# EAGLE board easySens-RS485-RND_455-00307-V001 (EAGLE 7.6.0)
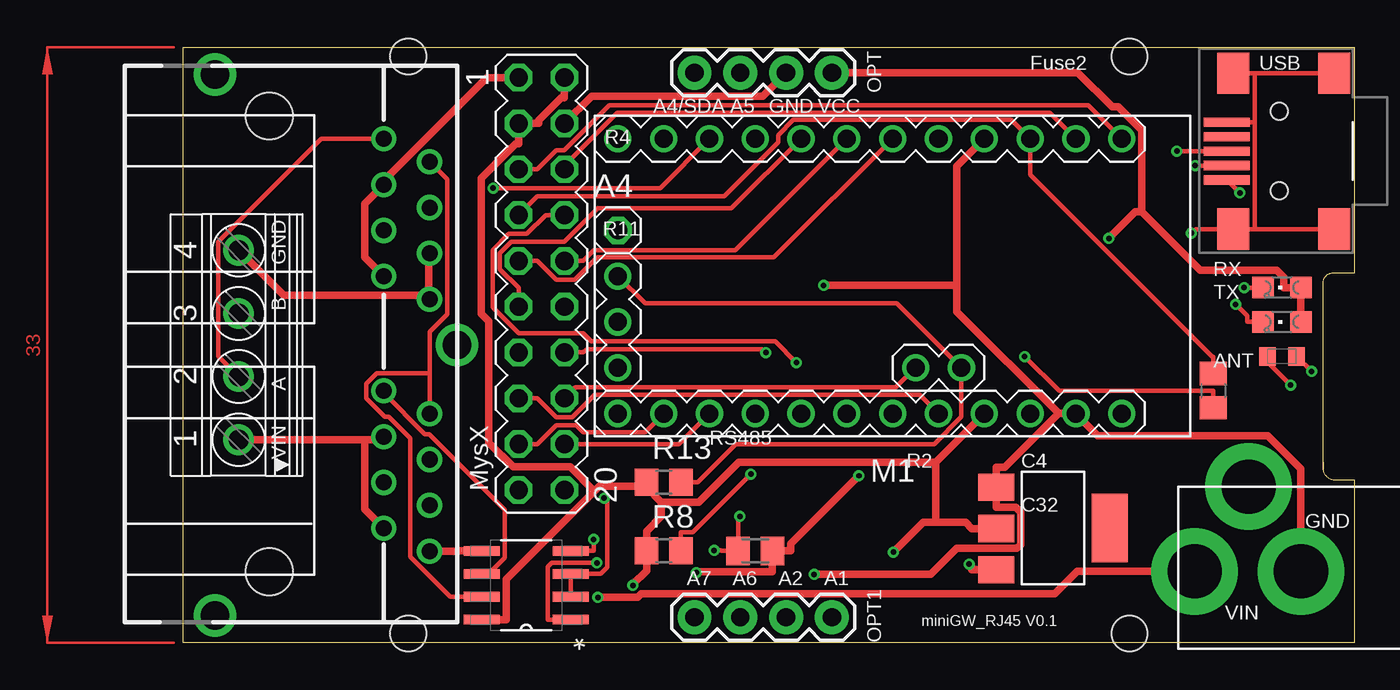
[diagram p0: board, top side]
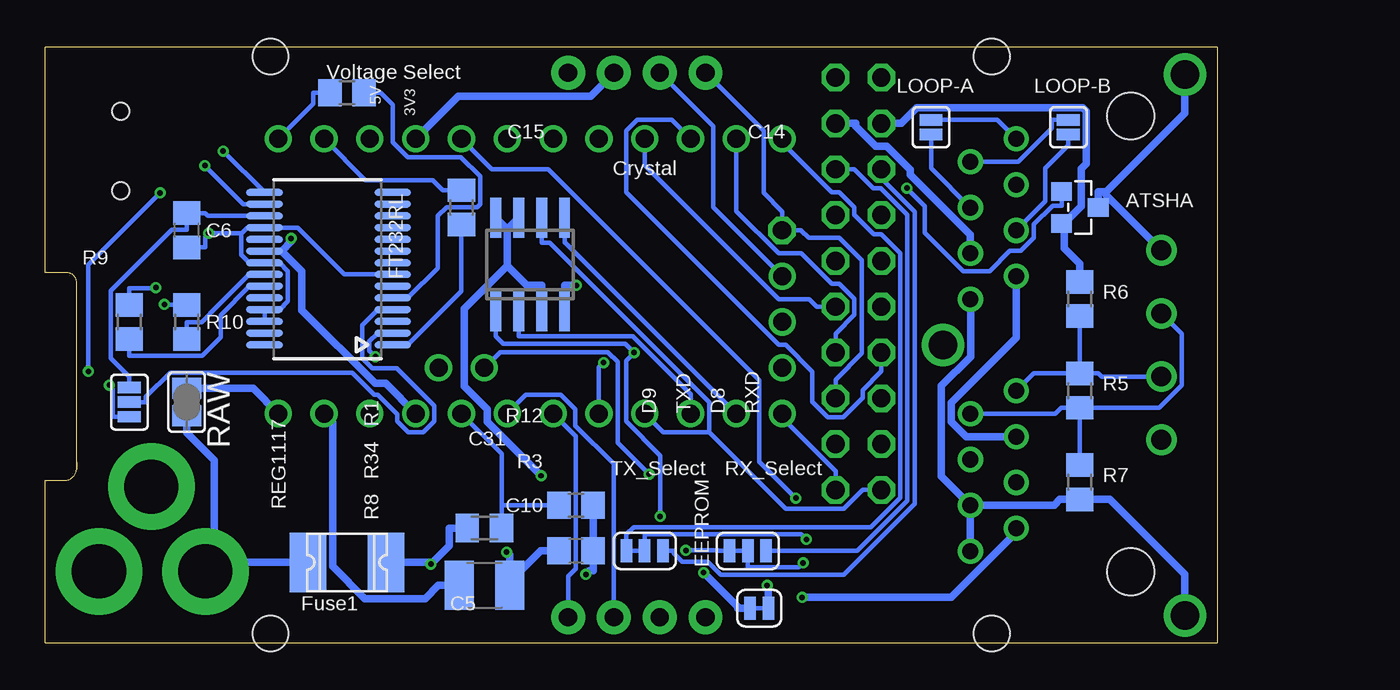
[diagram p1: board, bottom side, seen from below]

Size 65 x 33 mm. Coordinates in mm from the lower left corner, seen from the top.
Outline: 63.25,9.6 arc90 64,9 65,9 65,0 0,0 0,33 65,33 65,20.5 63.8,20.5 arc90 63.25,20 63.25,9.6
Outline: 63.25,9.6 63.25,10 63.25,9.6
Copper layers (1*16): Top 0.035mm / dielectric 1.5mm / Bottom 0.035mm
Design rules "SeeedStudio_2layer_DRU_no_angle_20140221": minimum track width 6mil, minimum drill 12mil, track to track 6mil, track to pad 6mil, pad to pad 6mil, via to via 6mil, smd to smd 0mil, copper to edge 10mil, drill to drill 10mil, minimum pad ring 10mil, minimum via ring 6mil, stop-mask expansion 2mil, vias tented up to drill 100mil, thermal gap 10mil
Net classes: 0 default: width 0.254 mm; 1 PWR: width 0.406 mm
Holes 2 mm at 52.5,0.5 52.5,32.5 12.5,0.5 12.5,32.5
tRestrict: area 50.3,-1.7 to 54.7,2.7; area 50.3,30.3 to 54.7,34.7; area 10.3,30.3 to 14.7,34.7; area 10.3,-1.7 to 14.7,2.7; area 15.2,-1.3 to 50.8,0.6
bRestrict: area 10.3,-1.7 to 14.7,2.7; area 50.3,-1.7 to 54.7,2.7; area 50.3,30.3 to 54.7,34.7; area 10.3,30.3 to 14.7,34.7; area 15.2,-1.3 to 50.8,0.6

## Footprints (pad centres in the part's own frame; a part is rotated, then mirrored left to right if it is on the bottom)
1X01 = drill 1.016 octagon: 1 0,0
C0805 = smd 1.3 x 1.5: 1 -0.95,0; 2 0.95,0
C1210 = smd 1.6 x 2.7: 1 -1.4,0; 2 1.4,0
1812L = smd 2.03 x 3.3: P$1 -2.16,0; P$2 2.16,0
0603-1608X90N = smd 0.95 x 1: 1 -0.8,0; 2 0.8,0
SOT23 = smd 1.016 x 1.143: 1 -0.889,-1.016; 2 0.889,-1.016; 3 0,1.016
SO-08 = smd 0.6 x 2.2: 1 -1.905,-2.6; 2 -0.635,-2.6; 3 0.635,-2.6; 4 1.905,-2.6; 5 1.905,2.6; 6 0.635,2.6; 7 -0.635,2.6; 8 -1.905,2.6
SOT223 = smd 1.499 x 2.007: 1 -2.261,-3.15; 2 0.025,-3.15; 3 2.311,-3.15 | smd 3.81 x 2.007: 4 0,3.15
SSOP28 = smd 0.381 x 2.032: 1 0,0; 2 0.65,0; 3 1.3,0; 4 1.95,0; 5 2.6,0; 6 3.25,0; 7 3.9,0; 8 4.55,0; 9 5.2,0; 10 5.85,0; 11 6.5,0; 12 7.15,0; 13 7.8,0; 14 8.45,0; 15 8.45,7.112; 16 7.8,7.112; 17 7.15,7.112; 18 6.5,7.112; 19 5.85,7.112; 20 5.2,7.112; 21 4.55,7.112; 22 3.9,7.112; 23 3.25,7.112; 24 2.6,7.112; 25 1.95,7.112; 26 1.3,7.112; 27 0.65,7.112; 28 0,7.112
RJ45_2X_NARROW_SHILDPINS = drill 0.889: 1-1 -11.43,6.35; 1-2 -10.16,8.89; 1-3 -8.89,6.35; 1-4 -7.62,8.89; 1-5 -6.35,6.35; 1-6 -5.08,8.89; 1-7 -3.81,6.35; 1-8 -2.54,8.89; 2-1 2.54,6.35; 2-2 3.81,8.89; 2-3 5.08,6.35; 2-4 6.35,8.89; 2-5 7.62,6.35; 2-6 8.89,8.89; 2-7 10.16,6.35; 2-8 11.43,8.89 | drill 1.575 pad 2.184: G1 -15,-3; G2 0,10.414; G3 15,-3 | hole 2.6: -12.7,0; 12.573,0
USB-MINI-B_2 = smd 0.508 x 2.54: 1 0,0; 2 0.8,0; 3 1.6,0; 4 2.4,0; 5 3.2,0 | smd 2.286 x 1.778: 6 -2.717,5.948; 7 -2.717,0.36; 8 5.918,0.36; 9 5.918,5.948 | hole 0.95: -0.6,2.9; 3.8,2.9
SMT-JUMPER_2_NC_TRACE_SILK = smd 0.635 x 1.27: 1 -0.508,0; 2 0.508,0
SMT-JUMPER_2_NC_PASTE_SILK = smd 0.635 x 1.27: 1 -0.406,0; 2 0.406,0
ARDUINO-PRO-MINI#NP = drill 1: J2.1 -1.27,5.08; J2.2 -3.81,5.08; J3.1 15.24,0; J3.2 15.24,2.54; J3.3 15.24,5.08; J6.1 -12.7,7.62; J6.2 -10.16,7.62; J6.3 -7.62,7.62; J6.4 -5.08,7.62; J6.5 -2.54,7.62; J6.6 0,7.62; J6.7 2.54,7.62; J6.8 5.08,7.62; J6.9 7.62,7.62; J6.10 10.16,7.62; J6.11 12.7,7.62; J6.12 15.24,7.62; J7.1 15.24,-7.62; J7.2 12.7,-7.62; J7.3 10.16,-7.62; J7.4 7.62,-7.62; J7.5 5.08,-7.62; J7.6 2.54,-7.62; J7.7 0,-7.62; J7.8 -2.54,-7.62; J7.9 -5.08,-7.62; J7.10 -7.62,-7.62; J7.11 -10.16,-7.62; J7.12 -12.7,-7.62
1X04 = drill 1.016 pad 1.88: 1 0,0; 2 2.54,0; 3 5.08,0; 4 7.62,0
M0805 = smd 1.3 x 1.6: 1 -0.95,0; 2 0.95,0
R0805 = smd 1.3 x 1.5: 1 -0.95,0; 2 0.95,0
SJ = smd 1.168 x 1.6: 1 -0.762,0; 2 0.762,0
SOIC127P600X175-8N = smd 1.981 x 0.533: 1 -2.464,1.905; 2 -2.464,0.635; 3 -2.464,-0.635; 4 -2.464,-1.905; 5 2.464,-1.905; 6 2.464,-0.635; 7 2.464,0.635; 8 2.464,1.905
CHIPLED_0805 = smd 1.2 x 1.2: A 0,-1.05; C 0,1.05
SMT-JUMPER_3_1-NC_TRACE_SILK = smd 0.635 x 1.27: 1 -1.016,0; 2 0,0; 3 1.016,0
MA10-2 = drill 1.016 octagon: 1 -11.43,-1.27; 2 -11.43,1.27; 3 -8.89,-1.27; 4 -8.89,1.27; 5 -6.35,-1.27; 6 -6.35,1.27; 7 -3.81,-1.27; 8 -3.81,1.27; 9 -1.27,-1.27; 10 -1.27,1.27; 11 1.27,-1.27; 12 1.27,1.27; 13 3.81,-1.27; 14 3.81,1.27; 15 6.35,-1.27; 16 6.35,1.27; 17 8.89,-1.27; 18 8.89,1.27; 19 11.43,-1.27; 20 11.43,1.27
PJ-102A = drill 3 pad 4.8: RING 0.1,-3.39; RING_SW -4.6,-6.29; TIP 0.1,-9.29
SMT-JUMPER_3_NO_SILK = smd 0.635 x 1.27: 1 -0.813,0; 2 0,0; 3 0.813,0
1751264 = drill 1.1 pad 1.7: 1 -5.25,-0.1; 2 -1.75,-0.1; 3 1.75,-0.1; 4 5.25,-0.1

## Placement (x,y rotation side)
A4  [1X01]  24.13,22.86 0 top
C4  100nF  [C0805]  57.15,13.97 270 top
C5  47uF  [C1210]  40.64,3.17 0 bottom
C6  100nF  [C0805]  57.15,22.86 90 bottom
C10  22p  [C0805]  35.56,5.08 180 bottom
F1  1812L  [1812L]  48.26,4.45 180 bottom
F2  MFFSMF050  [0603-1608X90N]  60.96,15.88 0 top
IC1  ATSHA204A  [SOT23]  7.62,24.13 270 bottom
IC2  AT25DF512C-SSHN-B  [SO-08]  38.1,20.95 0 bottom
IC3  REG1117  [SOT223]  48.26,6.35 270 top
IC4  FT232RL  [SSOP28]  45.72,16.51 90 bottom
J1  [RJ45_2X_NARROW_SHILDPINS]  4.8,16.5 270 top
J3  [USB-MINI-B_2]  57.9,28.85 270 top
JP1  JUMPER-SMT_2_NC_TRACE_SILK  [SMT-JUMPER_2_NC_TRACE_SILK]  25.4,1.91 0 bottom
LAN4  JUMPER-SMT_2_NC_PASTE_SILK  [SMT-JUMPER_2_NC_PASTE_SILK]  15.88,28.57 90 bottom
LAN5  JUMPER-SMT_2_NC_PASTE_SILK  [SMT-JUMPER_2_NC_PASTE_SILK]  8.26,28.57 90 bottom
M1  ARDUINO-PRO-MINI-3.3V#NP  [ARDUINO-PRO-MINI#NP]  39.37,20.32 180 top
OPT  [1X04]  36,31.6 180 top
OPT1  [1X04]  36,1.4 180 top
R1  1M  [M0805]  40.64,6.35 0 bottom
R2  56k  [M0805]  31.75,5.08 0 top
R3  470K  [R0805]  35.56,7.62 0 bottom
R5  150R  [R0805]  7.62,13.97 270 bottom
R6  330R  [R0805]  7.62,19.05 270 bottom
R7  330R  [R0805]  7.62,8.89 270 bottom
R8  10K  [R0805]  26.67,5.08 0 top
R9  330  [R0805]  60.33,17.78 90 bottom
R10  330  [R0805]  57.15,17.78 90 bottom
R11  1K  [R0805]  48.26,30.48 0 bottom
R12  1K  [R0805]  41.91,24.13 270 bottom
R13  10K  [R0805]  26.67,8.89 0 top
RAW  [SJ]  57.15,13.34 270 bottom
RS485  MAX487ECSA+  [SOIC127P600X175-8N]  19.05,3.17 180 top
RX  Red  [CHIPLED_0805]  60.96,19.68 90 top
RX_SEL  JUMPER-SMT_3_1-NC_TRACE_SILK  [SMT-JUMPER_3_1-NC_TRACE_SILK]  26.04,5.08 180 bottom
SV1  [MA10-2]  19.9,19.89 270 top
TX  Green  [CHIPLED_0805]  60.96,17.78 90 top
TX_SEL  JUMPER-SMT_3_1-NC_TRACE_SILK  [SMT-JUMPER_3_1-NC_TRACE_SILK]  31.75,5.08 180 bottom
U$3  2.1MMJACKTHM  [PJ-102A]  65.4,4.05 270 top
V_SEL  JUMPER-SMT_3_NO_SILK  [SMT-JUMPER_3_NO_SILK]  60.33,13.34 90 bottom
X1  1751264  [1751264]  3,16.5 90 top

## Library data of the parts
A4 = pinhead
C4 C6 R9-R12 = resistor@1
C5 C10 R1 R3 R5-R8 R13 = rcl
F1 = ptc-littlefuse
F2 = Arduino-rcl; DATASHEET: http://www.bourns.com/docs/Product-Datasheets/mffsmf.pdf; DISTRIBUTOR-LINK: http://www.digikey.com/product-detail/en/bourns-inc/MF-FSMF050X-2/MF-FSMF050X-2CT-ND/2039389; DISTRIBUTOR-PN: MF-FSMF050X-2CT-ND; MANUFACTURER: Bourns Inc; MANUFACTURER-PN: MF-FSMF050X-2
IC1 = Sensor
IC2 = microchip; MF: MICROCHIP; MPN: 25AA080/SN; OC_FARNELL: 1816072; OC_NEWARK: 92C7351
IC3 = burr-brown; MPN: REG1117; OC_FARNELL: 1097566; OC_NEWARK: 14P6981
IC4 = IntegratedCircuits; CASE: SSOP28; MONTHLY_USAGE: _____; PART_NUMBER: FT232RL; PRICE: _____; SUPPLIER: _____; TYPE: Circuito_Integrato
J1 = RJ45
J3 = Connettori; MONTHLY_USAGE: _____; PART_NUMBER: 14850; PRICE: _____; SUPPLIER: _____; TYPE: Connettori
JP1 LAN4 LAN5 RX_SEL TX_SEL V_SEL = SparkFun-Jumpers
M1 = diy-modules
OPT OPT1 = SparkFun-Connectors; PROD_ID: CONN-09696
R2 = resistor
RAW = jumper
RS485 = Maxim_By_element14_Batch_1; MPN: MAX487ECSA+; OC_FARNELL: 9724532; OC_NEWARK: 68K4803; PACKAGE: SOIC-8; SUPPLIER: Maxim
RX = Opto; MONTHLY_USAGE: _____; PART_NUMBER: KTP-2012SURCK; PRICE: _____; SUPPLIER: _____; TYPE: Opto
SV1 = con-lstb; OC_FARNELL: unknown; OC_NEWARK: unknown
TX = Opto; MONTHLY_USAGE: _____; PART_NUMBER: KPT-2012SGC; PRICE: _____; SUPPLIER: _____; TYPE: Opto
U$3 = adafruit
X1 = con-phoenix-350; MPN: 1751264; OC_FARNELL: unknown; OC_NEWARK: 10R0934

## Nets
3V3: C6.2 IC4.17 V_SEL.3
4: J1.1-4 LAN4.1
5: J1.1-5 LAN5.1
A: J1.1-1 J1.2-1 LAN4.2 R5.1 R6.2 RS485.6 X1.2
A0: M1.J6.8 SV1.8
A1: M1.J6.7 OPT1.1
A2: M1.J6.6 OPT1.2
A3: M1.J6.5 R1.2 R3.1 SV1.15
A4: A4.1 M1.J2.1 OPT.4 R8.2 SV1.16
A5: M1.J2.2 M1.J3.1 OPT.3 R13.2
A6: M1.J3.2
A7: M1.J3.3
B: J1.1-2 J1.2-2 LAN5.2 R5.2 R7.1 RS485.7 X1.3
COM: C6.1 IC4.7 IC4.18 IC4.21 IC4.25 IC4.26 J3.1 J3.6 J3.7 J3.8 J3.9
D1-TXD: M1.J7.12 R11.1 SV1.5 TX_SEL.1
D2_INT0: M1.J7.8 RS485.2 RS485.3
D3: M1.J7.7 SV1.9
D4: M1.J7.6 SV1.10
D5: M1.J7.5 SV1.11
D6: M1.J7.4 SV1.12
D7-ATSHA: IC1.1 M1.J7.3 SV1.13
D8: IC2.1 M1.J7.2 R2.1 RX_SEL.3 SV1.14
D9_IRQ: M1.J7.1 TX_SEL.3
D10_SS: M1.J6.12 SV1.20
D11_MOSI: IC2.5 M1.J6.11 SV1.17
D12_MISO: IC2.2 M1.J6.10 SV1.18
D13_SCK: IC2.6 M1.J6.9 SV1.19
GND [PWR]: C5.1 C10.1 IC1.3 IC2.4 IC3.1 J1.1-6 J1.1-8 J1.2-6 J1.2-8 J1.G1 J1.G3 M1.J6.2 M1.J7.9 OPT.2 R3.2 R7.2 RS485.5 SV1.4 U$3.RING X1.4
N$1: IC4.4 V_SEL.2
N$2: IC4.22 R10.1
N$4: C4.2 IC4.2
N$5: IC4.15 J3.3
N$6: IC4.16 J3.4
N$7: R9.2 RX.C
N$8: IC4.23 R9.1
N$9: R10.2 TX.C
N$26: F2.2 J3.5
RAW1 [PWR]: M1.J6.1 RAW.1
RESET: C4.1 M1.J7.10 SV1.7
RX: RS485.1 RX_SEL.2
RX232: IC4.1 R12.2
RXD: M1.J7.11 R12.1 RX_SEL.1 SV1.6
TX: RS485.4 TX_SEL.2
TX232: IC4.5 R11.2
VCC [PWR]: C5.2 C10.2 IC1.2 IC3.2 IC4.20 JP1.2 M1.J6.4 OPT.1 R6.1 R8.1 R13.1 RS485.8 RX.A SV1.2 SV1.3 TX.A
VCC1 [PWR]: IC2.3 IC2.7 IC2.8 JP1.1 R2.2
VIN [PWR]: F1.P$2 J1.1-3 J1.1-7 J1.2-3 J1.2-7 RAW.2 SV1.1 U$3.TIP X1.1
VIN-FUSED [PWR]: F1.P$1 IC3.3 R1.1
VUSB: F2.1 V_SEL.1

## Tracks (layer width: path | path; a pad name or v marks a point on that pad's centre or on a via)
3V3
  Bottom 0.254: V_SEL.3 60.33,14.74 61.35,15.77 61.35,19.5 57.98,22.88 57.15,22.88 C6.2 56.12,23.81 55.97,23.66 IC4.17
4
  Bottom 0.254: LAN4.1 15.88,26.3 J1.1-4
5
  Bottom 0.254: LAN5.1 8.26,27.57 9.54,26.29 9.54,24.46 J1.1-5
A
  Top 0.254: J1.2-1 11.15,13.85 13.43,11.56 13.66,11.56 17.86,7.37 17.86,4.7 16.97,3.81 RS485.6 | X1.2 1.97,15.88 1.97,22.22 7.68,27.93 J1.1-1
  Bottom 0.254: J1.1-1 12.2,28.98 LAN4.2 | R5.1 6.59,14.92 6.42,14.75 X1.2 | R5.1 10.19,14.92 J1.2-1 | R6.2 R5.1
A0  (via drill 0.3 pad 0.61)
  Top 0.254: v34.03,15.53 32.86,16.7 22.67,16.7 22.21,17.15 18.63,17.15 17.18,18.6 17.18,21.77 18.08,22.66 19.09,22.66 20.13,23.7 SV1.8
  Bottom 0.254: M1.J6.8 34.29,15.27 v34.03,15.53
A1
  Bottom 0.254: OPT1.1 36,3.66 35.58,4.08 35.58,11.45 M1.J6.7
A2
  Bottom 0.254: OPT1.2 33.46,9.9 35.59,12.04 35.59,12.92 36.4,13.73 38.34,13.73 M1.J6.6
A3
  Top 0.254: SV1.15 19.67,13.54 20.71,12.5 21.6,12.5 22.84,13.74 40.87,13.74 M1.J6.5
  Bottom 0.254: 39.69,7.62 R1.2 | M1.J6.5 39.69,10.48 39.69,7.62 | 39.69,7.62 37.44,7.62 R3.1
A4  (via drill 0.3 pad 0.61)
  Top 0.254: v31.5,9.34 28.27,6.11 27.62,6.11 R8.2 | SV1.16 21.77,14.14 39.55,14.14 M1.J2.1
  Bottom 0.254: M1.J2.1 39.77,16.11 33.79,16.11 33.26,15.57 33.26,11.09 v31.5,9.34 | SV1.16 21.17,14.59 19.72,16.04 19.72,21.2 20.96,22.43 22.66,22.43 23.09,22.86 A4.1 24.13,23.9 25.16,24.93 25.16,28.38 OPT.4
A5
  Top 0.254: R13.2 28.55,8.89 30.67,11.01 41.68,11.01 43.18,12.51 M1.J2.2 39.61,18.81 25.64,18.81 M1.J3.1
  Bottom 0.254: M1.J3.1 27.94,24.13 27.94,28.62 OPT.3
B
  Top 0.254: 13.69,14.94 13.69,17.23 14.67,18.21 14.67,25.68 J1.1-2 | J1.2-2 13.69,14.94 | RS485.7 14.83,2.54 12.62,4.75 12.62,11.33 11.44,12.52 11.21,12.52 10.17,13.55 10.17,14.37 10.75,14.94 13.69,14.94
  Bottom 0.254: LAN5.2 9.17,28.98 9.17,28.53 11.04,26.66 J1.1-2 | R5.2 8.65,13.02 8.98,12.69 J1.2-2 | R5.2 7.62,10.77 R7.1 | X1.3 1.97,17.12 1.97,14.28 3.23,13.02 R5.2
COM  (via drill 0.3 pad 0.61)
  Top 0.254: v55.94,22.7 56.17,22.93 J3.8 59.45,22.93 | 59.45,31.57 J3.6 | J3.7 59.45,31.57 | 59.45,31.57 59.45,28.85 | J3.9 59.45,22.93 | 59.45,22.93 59.45,28.85 | J3.1 59.45,28.85
  Bottom 0.254: IC4.26 IC4.25 51.99,18.46 51.53,18.92 51.53,20.6 51.99,21.06 IC4.21 53.67,21.06 54.13,21.52 54.13,22.68 | 54.13,22.68 54.15,22.7 v55.94,22.7 56.12,22.51 56.12,21.91 C6.1 | 54.13,22.68 53.79,23.01 IC4.18 51,23.01 48.4,20.41 IC4.7
D1-TXD
  Top 0.254: M1.J7.12 50.22,29.79 23.65,29.79 21.15,27.29 20.71,27.29 19.67,26.25 SV1.5
  Bottom 0.254: TX_SEL.1 30.14,5.08 30.14,4.95 29.67,4.48 28.25,4.48 27.53,3.76 20.71,3.76 16.77,7.7 16.77,23.9 18.63,25.76 SV1.5 | R11.1 50.14,30.48 50.14,29.87 M1.J7.12
D2_INT0  (via drill 0.3 pad 0.61)
  Top 0.254: v23.37,8.01 23.55,7.83 23.55,4.18 23.18,3.81 22.78,3.81 RS485.3 RS485.2
  Bottom 0.254: M1.J7.8 40.23,26.26 37.1,26.26 25.4,14.56 25.4,10.04 v23.37,8.01
D3
  Top 0.254: SV1.9 19.67,21.16 20.71,20.12 21.74,20.12 22.98,21.35 32.78,21.35 M1.J7.7
D4
  Top 0.254: SV1.10 22.21,21.16 22.81,21.76 30.65,21.76 M1.J7.6
D5
  Top 0.254: M1.J7.5 30.42,24.07 23.02,24.07 21.17,22.23 18.22,22.23 17.59,21.6 17.59,20.71 18.63,19.67 SV1.11
D6
  Bottom 0.254: SV1.12 22.21,18.62 22.64,19.05 24.32,19.05 31.75,26.48 M1.J7.4
D7-ATSHA  (via drill 0.3 pad 0.61)
  Top 0.254: v17.21,25.2 26.47,25.2 M1.J7.3
  Bottom 0.254: v17.21,25.2 16.21,24.2 16.21,22.72 14.09,20.6 12.63,20.6 11.5,21.72 10.89,21.72 10.17,22.45 10.17,23.18 9.12,24.23 8.64,24.23 IC1.1 | SV1.13 18.63,15.04 19.67,14 19.67,13.57 20.74,12.5 21.6,12.5 22.45,13.35 22.45,15.02 23.94,16.51 24.32,16.51 32.79,24.97 32.79,28.37 32.18,28.98 30.25,28.98 M1.J7.3
D8  (via drill 0.3 pad 0.61)
  Top 0.254: v30.89,7 30.8,6.9 R2.1 29.87,5.08 29.84,5.11 v29.46,5.11 | v32.34,16.08 32.15,16.27 22.4,16.27 22.21,16.09 SV1.14
  Bottom 0.254: v30.89,7 30.89,10.37 32.78,12.27 32.78,15.63 v32.34,16.08 32.83,16.57 39.59,16.57 40.01,16.98 IC2.1 | M1.J7.2 26.67,23.93 24.33,21.59 23.07,21.59 21.37,19.89 20.96,19.89 20.13,19.06 20.13,18.17 21.17,17.13 SV1.14 | RX_SEL.3 27.65,5.08 27.68,5.11 v29.46,5.11
D9_IRQ
  Bottom 0.254: M1.J7.1 24.13,27.73 21.38,24.98 20.97,24.98 20.13,24.14 20.13,23.73 19.04,22.64 18.63,22.64 17.59,21.6 17.59,8.03 19.22,6.41 32.35,6.41 32.77,5.99 TX_SEL.3
D10_SS
  Bottom 0.254: SV1.20 21.17,9.51 24.13,12.47 M1.J6.12
D11_MOSI
  Top 0.254: SV1.17 19.67,11.01 20.71,12.05 21.83,12.05 22.21,11.67 25.64,11.67 M1.J6.11
  Bottom 0.254: IC2.5 36.2,22.18 36.15,22.18 M1.J6.11
D12_MISO
  Top 0.254: M1.J6.10 27.52,11.01 SV1.18
  Bottom 0.254: IC2.2 38.73,16.98 32.41,16.98 29.21,13.78 M1.J6.10
D13_SCK
  Bottom 0.254: 28.17,11.67 30.72,11.67 M1.J6.9 | 28.17,11.67 23.93,7.42 20.71,7.42 19.67,8.46 SV1.19 | 28.17,11.67 28.17,13.32 37.03,22.18 37.47,22.18 IC2.6
GND  (via drill 0.3 pad 0.61)
  Top 0.406: 48.57,12.71 M1.J6.2 50.75,11.48 60.18,11.48 62.01,9.65 U$3.RING | RS485.5 15.24,5.08 15.23,5.07 J1.2-8 | 48.57,12.71 45.58,9.72 45.11,9.72 IC3.1 45.11,7.51 46.19,7.51 46.47,7.23 46.47,5.43 46.26,5.22 42.92,5.22 41.48,3.78 v35.01,3.78 | 42.93,19.81 42.93,18.34 48.57,12.71 | OPT.2 32.16,30.3 22.69,30.3 SV1.4 | 13.65,19.25 5.6,19.25 X1.4 | 13.65,19.25 13.65,19.08 J1.1-8 | J1.1-6 13.65,21.54 13.65,19.25 | 42.93,19.81 v35.54,19.81 | M1.J7.9 42.93,26.42 42.93,19.81
  Bottom 0.406: SV1.4 20.05,28.79 20.05,28.63 18.94,27.52 18.32,27.52 17.02,26.21 17.02,25.94 13.69,22.61 J1.1-6 | M1.J6.2 49.05,12.22 49.05,4.22 47.27,2.44 43.93,2.44 43.2,3.17 C5.1 | OPT.2 34.76,30.3 42.09,30.3 M1.J7.9 | IC1.3 6.6,24.99 6.16,24.99 | J1.2-6 J1.2-8 | IC2.4 36.2,19.81 v35.54,19.81 | J1.1-8 13.68,19.03 13.68,15.86 15.31,14.23 15.31,9.23 J1.2-6 | J1.2-6 9.06,7.61 8.73,7.94 R7.2 5.96,7.94 1.8,3.78 J1.G3 | R3.2 C10.1 34.61,3.97 34.82,3.97 v35.01,3.78 | X1.4 6.16,24.81 6.16,24.99 | J1.G1 1.8,29.35 6.16,24.99
N$1
  Bottom 0.254: V_SEL.2 59.41,13.34 59.41,13.62 58.07,14.96 47.98,14.96 46.75,13.73 46.56,13.73 45.48,12.65 45.48,12.27 44.88,11.66 44.02,11.66 43.41,12.28 43.41,13.13 45.49,15.21 46.86,15.21 47.42,15.77 47.42,17.6 46.56,18.46 IC4.4
N$2
  Bottom 0.254: R10.1 57.15,17.76 56.31,17.76 55.83,18.24 55.83,18.26 53.68,20.41 IC4.22
N$4  (via drill 0.3 pad 0.61)
  Top 0.254: v46.69,15.86 48.59,13.95 57.15,13.95 C4.2
  Bottom 0.254: IC4.2 46.56,17.16 47.02,16.71 47.02,16.19 v46.69,15.86
N$5  (via drill 0.3 pad 0.61)
  Top 0.254: J3.3 v55.12,27.25
  Bottom 0.254: IC4.15 v55.12,27.25
N$6  (via drill 0.3 pad 0.61)
  Top 0.254: J3.4 v56.14,26.45
  Bottom 0.254: IC4.16 54,24.31 v56.14,26.45
N$7  (via drill 0.3 pad 0.61)
  Top 0.254: RX.C v58.85,19.68
  Bottom 0.254: R9.2 60.33,19.66 58.88,19.66 v58.85,19.68
N$8
  Bottom 0.254: R9.1 60.33,15.9 56.28,15.9 55.27,16.92 55.27,18.16 53.67,19.76 IC4.23
N$9  (via drill 0.3 pad 0.61)
  Top 0.254: TX.C 59.03,17.78 59.03,18.11 v58.39,18.76
  Bottom 0.254: R10.2 58.18,18.73 58.21,18.76 v58.39,18.76
N$26  (via drill 0.3 pad 0.61)
  Top 0.254: J3.5 v58.62,24.93 | v62.6,15.03 F2.2
  Bottom 0.254: v62.6,15.03 62.6,20.95 v58.62,24.93
RAW1
  Bottom 0.406: RAW.1 53.47,14.1 M1.J6.1
RESET
  Top 0.254: SV1.7 19.67,24.75 30.02,24.75 33.02,27.75 33.02,28.14 33.86,28.98 45.95,28.98 M1.J7.10 46.99,25.94 57.09,15.85 57.15,15.85 C4.1
RX  (via drill 0.3 pad 0.61)
  Top 0.254: v22.96,4.42 20.47,4.42 20.24,4.19 20.24,1.27 RS485.1
  Bottom 0.254: RX_SEL.2 26.04,4.17 23.22,4.17 v22.96,4.42
RX232
  Bottom 0.254: R12.2 41.91,19.48 44.88,16.51 IC4.1
RXD
  Top 0.254: M1.J7.11 48.09,29.38 24.11,29.38 21.17,26.44 SV1.6
  Bottom 0.254: R12.1 42.94,25.08 43.51,25.65 47.24,25.65 M1.J7.11 | RX_SEL.1 24.42,5.08 19.97,5.08 17.18,7.87 17.18,23.74 18.65,25.2 19.09,25.2 20.13,26.25 SV1.6
TX  (via drill 0.3 pad 0.61)
  Top 0.254: v22.78,5.72 22.78,5.08 RS485.4
  Bottom 0.254: v22.78,5.72 23.06,5.99 31.75,5.99 TX_SEL.2
TX232
  Bottom 0.254: R11.2 46.38,30.48 45.72,29.82 45.72,27.74 44.88,26.91 41.94,26.91 40.88,25.85 40.88,24.31 41.04,24.15 42.74,24.15 43.23,23.66 43.23,20.77 44.88,19.11 IC4.5
VCC  (via drill 0.3 pad 0.61)
  Top 0.406: 26.55,7.78 25.72,8.61 | 41.75,10 30.83,10 28.61,7.78 26.55,7.78 | 26.55,7.78 26.55,7.01 25.72,6.19 R8.1 25.72,3.97 24.97,3.22 v24.97,3.17 | 41.75,10 41.75,6.66 | M1.J6.4 41.75,10 | 22.82,8.4 21.48,9.73 18.32,9.73 16.97,11.09 16.97,17.8 16.55,18.22 16.55,25.76 18.46,27.67 18.63,27.67 SV1.3 19.75,28.79 19.75,28.95 21,30.21 21.17,30.21 SV1.2 | 22.82,8.4 17.93,3.51 17.93,1.27 RS485.8 | 25.72,8.61 25.66,8.68 23.1,8.68 22.82,8.4 | R13.1 25.72,8.61 | TX.A RX.A 61.05,19.68 61.05,20.25 60.66,20.64 56.42,20.64 53.18,23.88 | 41.75,6.66 41.06,6.66 v39.41,5.01 | 41.75,6.66 43.41,6.66 43.75,6.33 IC3.2 | 53.18,23.88 52.82,23.88 v51.35,22.41 | OPT.1 49.64,31.6 51.53,29.71 51.88,29.71 53.18,28.41 53.18,23.88
  Bottom 0.406: 8.48,23.24 8.48,21.87 7.62,21.01 R6.1 | 8.48,23.24 7.53,24.19 7.53,26.28 7.26,26.55 7.26,29.45 7.47,29.66 16.66,29.66 17.51,28.8 17.51,28.79 SV1.3 | 8.48,23.24 IC1.2 | JP1.2 24.89,3.1 v24.97,3.17 | 39.24,4.01 39.24,4.88 39.27,4.88 v39.41,5.01 | C10.2 37.52,5.08 38.59,4.01 39.24,4.01 | C5.2 39.24,4.01 | v51.35,22.41 51.35,22.24 51.88,21.71 | IC4.20 51.88,21.71 | 51.88,21.71 50.76,20.59 50.76,18.42 46.71,14.37 46.12,14.37 M1.J6.4
VCC1  (via drill 0.3 pad 0.61)
  Top 0.406: v28.48,3.88 28.53,3.92 32.7,3.92 32.7,4.62 R2.2 33.71,5.08 33.71,5.47 v37.49,9.25
  Bottom 0.406: v28.48,3.88 26.58,1.98 26.58,1.91 JP1.1 | 39.37,20.9 41.75,18.51 41.75,14.2 40.48,12.93 40.48,12.24 v37.49,9.25 | 39.37,20.9 38.28,19.81 37.47,19.81 IC2.3 | 39.37,22.92 39.37,20.9 | IC2.7 39.37,22.92 | 39.37,22.92 IC2.8
VIN  (via drill 0.3 pad 0.61)
  Top 0.406: v23.02,2.51 25.24,2.51 25.43,2.7 48.35,2.7 49.6,3.95 U$3.TIP | SV1.1 16.86,31.32 11.15,25.61 J1.1-3 10.1,24.34 10.1,21.36 J1.1-7 | 10.1,11.25 10.98,11.25 J1.2-3 | X1.1 10.1,11.25 | J1.2-7 10.1,7.39 10.1,11.25
  Bottom 0.406: 55.62,4.45 51.79,4.45 F1.P$2 | U$3.TIP 55.62,4.45 | 55.62,4.45 55.62,10.1 57.15,11.63 RAW.2 | J1.2-7 11.15,6.12 14.76,2.51 v23.02,2.51 | J1.2-3 13.92,11.42 14.75,12.25 14.75,13.29 11.15,16.89 J1.1-7
VIN-FUSED  (via drill 0.3 pad 0.61)
  Top 0.406: IC3.3 43.75,4.04 43.75,4.2 v43.61,4.34
  Bottom 0.406: R1.1 42.6,6.35 42.6,5.36 v43.61,4.34 43.71,4.45 44.73,4.45 F1.P$1
VUSB  (via drill 0.3 pad 0.61)
  Top 0.254: v61.43,14.27 60.16,15.54 F2.1
  Bottom 0.254: V_SEL.1 61.24,12.52 61.24,14.08 v61.43,14.27
(copper drawn outside any net)
  shapes: Top area x1

## Text on the board
tNames: Box: RND 455-00307 | Fuse2 | USB | A4/SDA | A5 | GND | VCC | OPT | R4 | R11 | GND | RX | TX | B | ANT | A | RS485 | VIN | R2 | C4 | MysX | C32 | GND | A7 | A6 | A2 | A1 | miniGW_RJ45 V0.1 | VIN | OPT1
bNames: Voltage Select | LOOP-B | LOOP-A | 5V | 3V3 | C14 | C15 | Crystal | FT232RL | ATSHA | C6 | R9 | R6 | R10 | R5 | RXD | D8 | TXD | D9 | R1 | R12 | REG1117 | C31 | R34 | R3 | R7 | RX_Select | TX_Select | R8 | C10 | EEPROM | C5 | Fuse1 | V-EEPROM | ATMEGA328P
tDocu: 1 Vraw (typically unregulated voltage, either from motherboard to daughterboard or vice versa) Motherboard should have a jumper to cut onboard Vraw source if daughterboard provides Vraw. Be sure to check motherboard constraints on Vraw before connecting a daughterboard that provides Vraw (for over voltage protection). Should be able to source at least 100mA and all boards are recommended to support a voltage up to 24V on this pin. / 2 +3.3V fixed voltage (can source at least 100mA) / 3 VCCio (depending on MCU core voltage). Should not be used for heavy loads. / 4 GND / 5 MYSX_D1_DFM - Digital IO (USART TX (data from MCU)) / 6 MYSX_D2_DTM - Digital IO (USART RX (data to MCU)) / 7 MYSX_RST - Reset (On the board that carries the MCU, it is highly recommended that this pin has a 0.1uF capacitor in series for pulse “generation”) / 8 MYSX_LEGACY_ID – MYSX 1.x identification (2.0 daughterboards can tie this pin to VCC to allow the motherboard to determine if daughterboard is 1.x or 2.x. If identification is not needed or is undesired, pin can be used as regular analog input) / 9 MYSX_D3_INT - Digital IO (interrupt) / 10 MYSX_D4_INT - Digital IO (interrupt) / 11 MYSX_D5_PWM - Digital IO (PWM) / 12 MYSX_D6_PWM - Digital IO (PWM) / 13 MYSX_D7_SCL - Digital IO (I2C SCL) / 14 MYSX_D8_SDA - Digital IO (I2C SDA) / 15 MYSX_D9_A3 - Digital IO (analog input) / 16 MYSX_D10_A4 - Digital IO (analog input) / 17 MYSX_D11_MOSI - Digital IO (SPI MOSI) / 18 MYSX_D12_MISO - Digital IO (SPI MISO) / 19 MYSX_D13_SCK - Digital IO (SPI SCK) / 20 MYSX_D14_CS - Digital IO (also for SPI CS) / 21 MYSX_A5 - Analog input / 22 MYSX_A6 - Analog input
Name: I2C-CON | A2 | A1